# Altium PCB PCB.pcbdoc
Units mil, origin at the board's own origin, x right, y up, seen from the top; angles counter-clockwise.
Board outline 6490 x 6610 mil, 2 copper layers (Top Layer, Bottom Layer); 18 components, 24 nets, 105 pads, 2 vias.
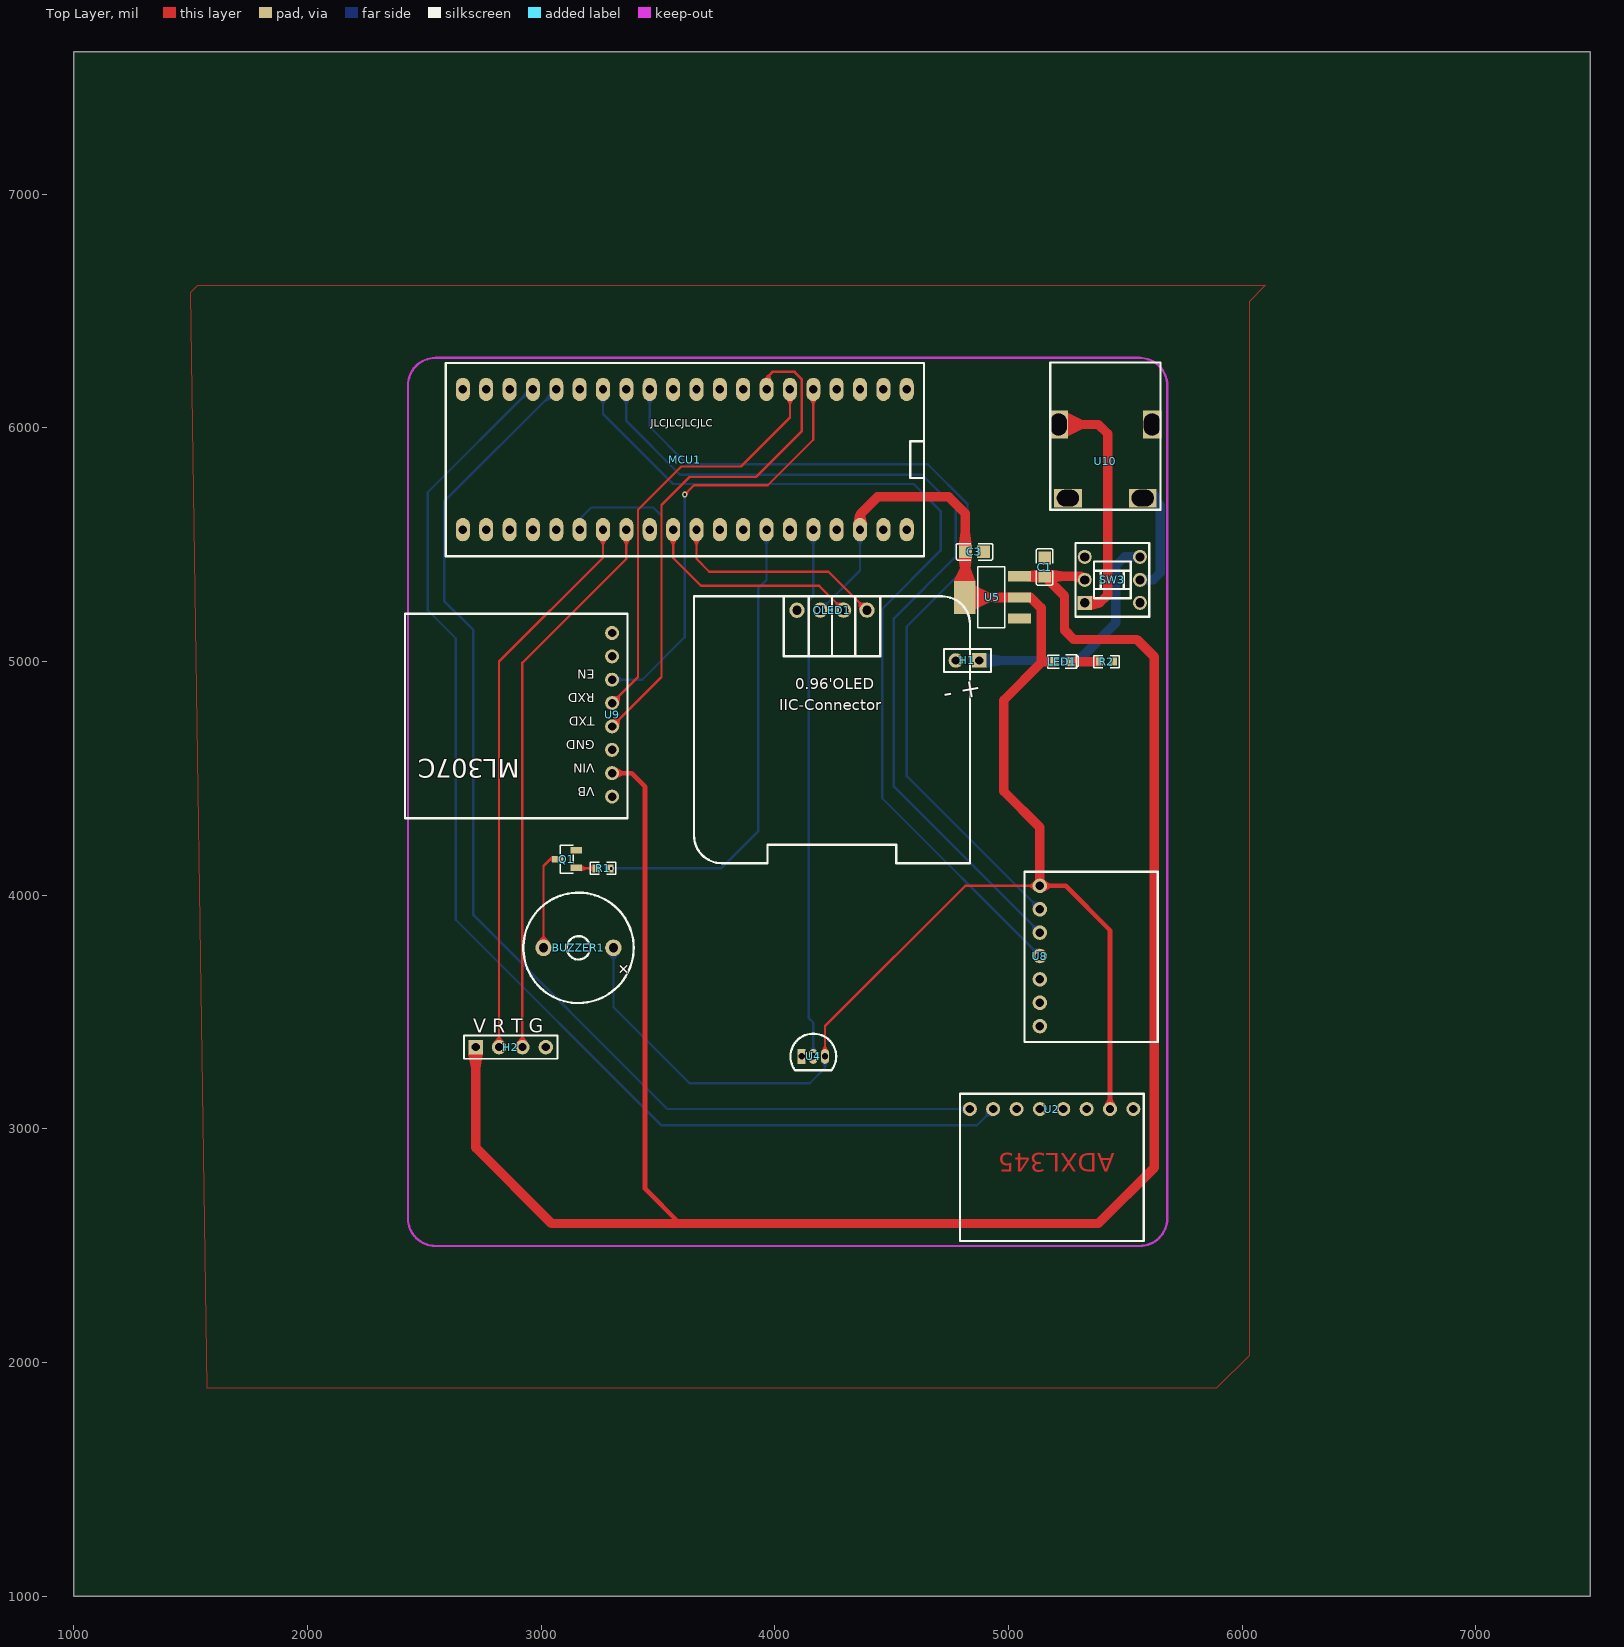
[diagram p0: Top Layer view]
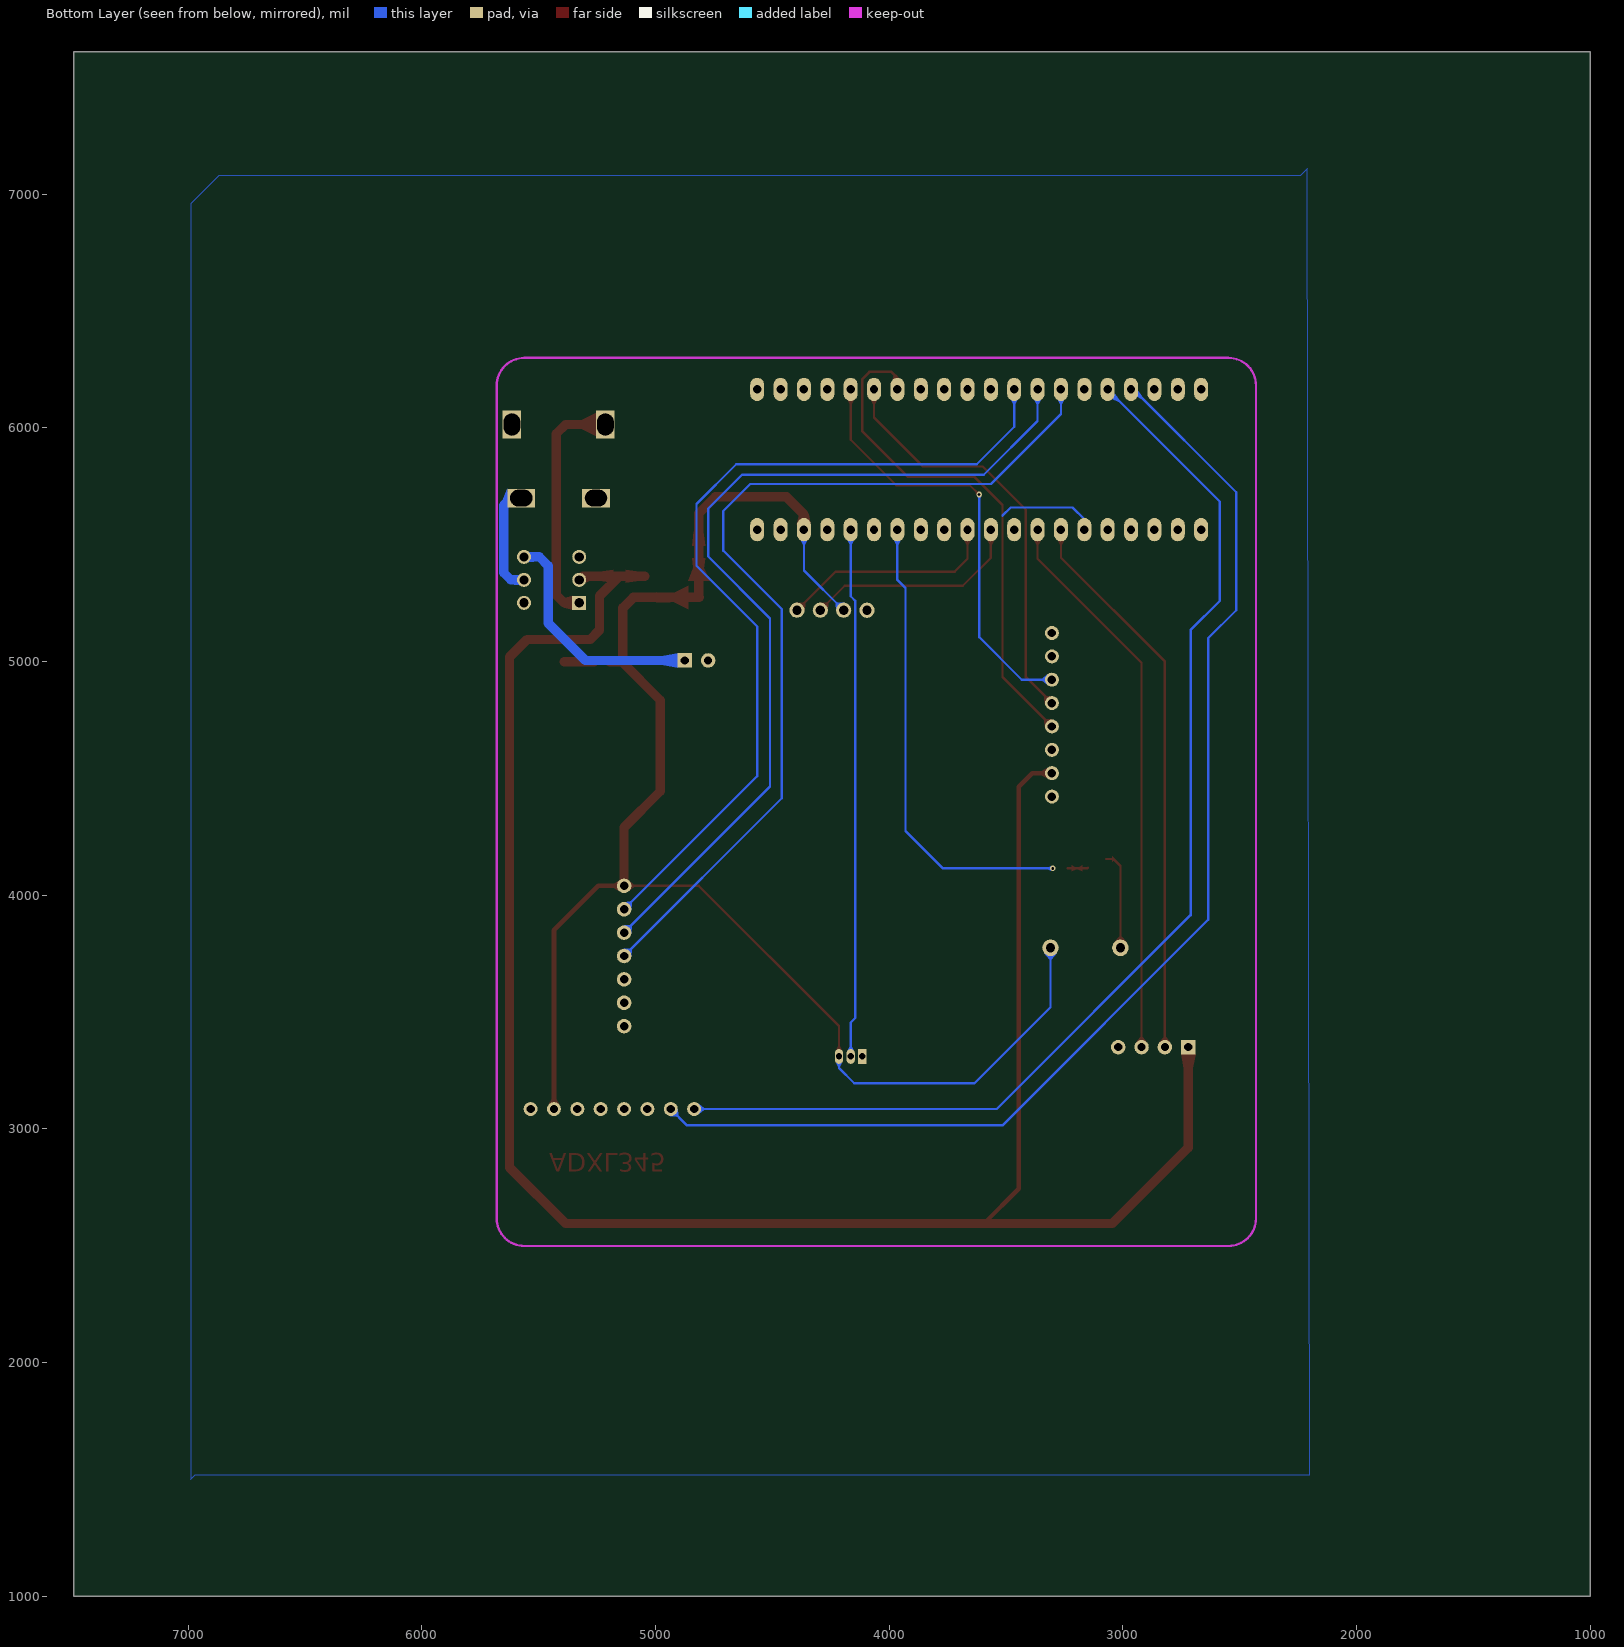
[diagram p1: Bottom Layer view, seen from below]

## Layer stack, top to bottom
Top Layer: signal copper (thickness not stored)
Dielectric: dielectric 12.6, FR-4, Dk 4.8
Bottom Layer: signal copper (thickness not stored)

## Board outline
7490,1000 1000,1000 1000,7610 7490,7610

## Components (designator, comment, footprint, x,y, rotation, side; value= is the part's Value field where it differs from the comment)
BUZZER1 "蜂鸣器" BUZ-TH_BD12.0-P7.60-D0.6-FD 3160,3775 r180 top
C1 "0.1uf" C0805 5155,5405 r270 top
C3 "0.1uf" C0805 4855,5470 r180 top
H1 "电池" HDR-F-2.54_1X2 4825,5005 r180 top
H2 "GPS模块" HDR-F-2.54_1X4 2870,3350 r0 top
LED1 "电源指示灯" LED0603_RED 5230.02,4999.97 r0 top
MCU1 "STM32F103C8T6" STM32F103C8T6_BLUE 3615,5865 r90 top
OLED1 "OLED模块" 0.96OLED_4P 4245,5220 r0 top
Q1 "S8050" SOT-23-3_L2.9-W1.3-P1.90-LS2.4-BR 3110,4155 r0 top
R1 "1k" R0603 3265,4115 r180 top
R2 "10k" R0603 5420,5000 r0 top
SW3 "HX 8-8 ZS" SW-TH_6P-L8.0-W8.0-P2.50-TL 5445,5350 r90 top
U2 "ADXL345" ADXL345 5580,3150 r270 top
U4 "DS18B20S" TO-92-3_L4.9-W3.7-P1.27-L 4165,3310 r0 top
U5 "AMS1117-3.3" SOT-223-3_L6.5-W3.5-P3.05-LS7.0 4930,5275 r0 top
U8 "MAX30102" MAX30100 5335,3740 r270 top
U9 "ML307R 4G CAT1模块" ML307R 2840,4865 r180 top
U10 "TYPEC充电放电模块" TYPEC充放电模块 5415,5965 r0 top

## Footprints (in the part's own frame and the unit in brackets; to place one, negate y for a bottom-side part, rotate by r counter-clockwise, add the part's x,y. Pads: shape width x height; smd on the part's side, far side on the other; paste and mask are expansions set on the pad)
0.96OLED_4P [mm]
  round 1.65 hole 1 paste+0 mask+0.051: 1(-3.81,-0.001) 2(-1.27,0.002) 3(1.27,0.002) 4(3.81,0.002)
  silkscreen extent -15,-27.5 15,1.5
ADXL345 [mil]
  round 60 hole 36 paste+0 mask+2: 1(65,-45) 2(65,-145) 3(65,-245) 4(65,-345) 5(65,-445) 6(65,-545) 7(65,-645) 8(65,-745)
  silkscreen extent 0,-787 630,0
BUZ-TH_BD12.0-P7.60-D0.6-FD [mm]
  round 1.8 hole 1 paste+0 mask+0.051: 1(-3.8,0) 2(3.8,0)
  silkscreen extent -6,-6 6,6
C0805 [mm]
  rect 1.41x1.35 smd paste-100 mask+0.051: 1(-1,0) 2(1,0)
  silkscreen extent -1.96,-0.9 1.96,0.9
HDR-F-2.54_1X2 [mil]
  rect 62x62 hole 35 paste+0 mask+2: 1(-50,0)
  round 62 hole 35 paste+0 mask+2: 2(50,0)
  silkscreen extent -100,-49 100,50
HDR-F-2.54_1X4 [mil]
  rect 62x62 hole 35 paste+0 mask+2: 1(-150,0)
  round 62 hole 35 paste+0 mask+2: 2(-50,0) 3(50,0) 4(150,0)
  silkscreen extent -200,-50 200,50
LED0603_RED [mm]
  rect 0.9x1 smd paste+0 mask+0.051: 1(-0.85,0) 2(0.85,0)
  silkscreen extent -1.54,-0.73 1.75,0.73
MAX30100 [mm]
  round 1.58 hole 0.914 paste+0 mask+0.051: 1(-7.62,-5.08) 2(-5.08,-5.08) 3(-2.54,-5.08) 4(0,-5.08) 5(2.54,-5.08) 6(5.08,-5.08) 7(7.62,-5.08)
  silkscreen extent -9.14,-6.75 9.36,7.75
ML307R [mil]
  round 60 hole 36 paste+0 mask+2: 1(-463.75,442.5) 2(-463.75,342.5) 3(-463.75,242.5) 4(-463.75,142.5) 5(-463.75,42.5) 6(-463.75,-57.5) 7(-463.75,-157.5) 8(-463.75,-257.5)
  silkscreen extent -530,-340 423,535
R0603 [mil]
  rect 31.75x34.02 smd paste-3937.01 mask+2: 1(-29.66,0) 2(29.66,0)
  silkscreen extent -55,-26 55,26
SOT-23-3_L2.9-W1.3-P1.90-LS2.4-BR [mm]
  rect 1.25x0.7 smd paste+0 mask+0.051: 1(1,-0.95) 2(1,0.95) 3(-1,0)
  silkscreen extent -0.73,-1.53 0.73,1.53
SOT-223-3_L6.5-W3.5-P3.05-LS7.0 [mm]
  rect 2.5x1.1 smd paste+0 mask+0.051: 1(2.97,-2.3) 2(2.97,0) 3(2.97,2.3)
  rect 2.34x3.6 smd paste+0 mask+0.051: 4(-2.97,0)
  silkscreen extent -1.57,-3.33 1.37,3.33
STM32F103C8T6_BLUE [mil]
  oval 100x60 hole 36 paste+0 mask+2: 1(-300,950) 2(-300,850) 3(-300,750) 4(-300,650) 5(-300,550) 6(-300,450) 7(-300,350) 8(-300,250) 9(-300,150) 10(-300,50) 11(-300,-50) 12(-300,-150) 13(-300,-250) 14(-300,-350) 15(-300,-450) 16(-300,-550) 17(-300,-650) 18(-300,-750) 19(-300,-850) 20(-300,-950) 21(300,-950) 22(300,-850) 23(300,-750) 24(300,-650) 25(300,-550) 26(300,-450) 27(300,-350) 28(300,-250) 29(300,-150) 30(300,-50) 31(300,50) 32(300,150) 33(300,250) 34(300,350) 35(300,450) 36(300,550) 37(300,650) 38(300,750) 39(300,850) 40(300,950)
  silkscreen extent -413,-1024 413,1024
SW-TH_6P-L8.0-W8.0-P2.50-TL [mil]
  rect 60x60 hole 39.37 paste+0 mask+2: 1(-98.43,118.11)
  round 60 hole 39.37 paste+0 mask+2: 2(0,118.11) 3(98.42,118.11) 4(-98.43,-118.11) 5(0,-118.11) 6(98.42,-118.11)
  silkscreen extent -157,-157 157,157
TO-92-3_L4.9-W3.7-P1.27-L [mm]
  rect 0.9x1.6 hole 0.7 paste+0 mask+0.051: 1(-1.27,0)
  oval 0.9x1.6 hole 0.7 paste+0 mask+0.051: 2(0,0) 3(1.27,0)
  silkscreen extent -2.48,-1.5 2.48,2.48
TYPEC充放电模块 [mm]
  rect 2x3 hole 1.8 slot 2.4 at 90 deg paste+0 mask+0.051: 1(-5.08,1.27) 2(5.08,1.27)
  rect 3x2 hole 1.8 slot 2.4 at 0 deg paste+0 mask+0.051: 3(4.064,-6.731) 4(-4.064,-6.731)
  silkscreen extent -6,-8 6,8

## Via types
v1: diameter 24.41, hole 12.2, Top Layer to Bottom Layer, tented both sides, 2 vias

## Nets (pads, with @x,y where several pads share a name; then routed paths per layer and width w, separated by ;. In a path a pad name is that pad's centre, name@x,y a point inside that pad or via, vN(x,y) a via of type N, cw(c..) or ccw(c..) an arc to the next point about the centre after c; other vN are vias at no path point)
ADC_VBAT: MCU1.5
ADX_SCL: MCU1.36 U2.8 | length 4969.4
  Bottom Layer w10: MCU1.36 2585,5685 2585,5260 2710,5135 2710,3915 3540,3085 U2.8
ADX_SDA: MCU1.37 U2.7 | length 5205.5
  Bottom Layer w10: MCU1.37 2955,6165 2515,5725 2515,5220 2635,5100 2635,3895 3515,3015 4865,3015 U2.7
BEEP: MCU1.14 R1.1 | length 2000.8
  Bottom Layer w10: v1(3300,4115) 3770,4115 3930,4275 3930,5315 3965,5350 MCU1.14
BUZZER1_2: BUZZER1.2 Q1.3 | length 422.9
  Top Layer w10: BUZZER1.2 3010.4,4125.4 3040,4155 Q1.3
DS18B20: MCU1.16 U4.2 | length 2271.6
  Bottom Layer w10: U4.2 4165,3455 4145,3475 4145,5260 4165,5280 MCU1.16
EN: MCU1.25 U9.6 | length 1859.2
  Top Layer w10: v1(3615,5715) 3655,5755 3970,5755 4165,5950 MCU1.25
  Bottom Layer w10: U9.6 3432.5,4922.5 3615,5105 v1(3615,5715)
GND: C1.1 C3.1 H1.2 H2.4 MCU1.19 MCU1.20 OLED1.1 Q1.2 R2.2 U2.1 U4.1 U5.1 U8.7 U9.3 U10.2 U10.4
GPS_RXD: H2.3 MCU1.8 | length 2399.3
  Top Layer w10: H2.3 2920,4995 3365,5440 MCU1.8
GPS_TXD: H2.2 MCU1.7 | length 2399.3
  Top Layer w10: H2.2 2820,5000 3265,5445 MCU1.7
LED1_2: LED1.2 R2.1 | length 126.8
  Top Layer w40: LED1.2 R2.1
MAX_INT: MCU1.34 U8.4 | length 4010
  Bottom Layer w10: MCU1.34 3265,6060 3565,5760 4595,5760 4710,5645 4710,5475 4460,5225 4460,4415 U8.4
MAX_SCL: MCU1.32 U8.2 | length 3735.5
  Bottom Layer w10: MCU1.32 3465,6005 3625,5845 4655,5845 4825,5675 4825,5410 4565,5150 4565,4510 U8.2
MAX_SDA: MCU1.33 U8.3 | length 3884
  Bottom Layer w10: MCU1.33 3365,6030 3595,5800 4630,5800 4775,5655 4775,5450 4510,5185 4510,4465 U8.3
OLED_SCL: MCU1.10 OLED1.3 | length 943.2
  Top Layer w10: MCU1.10 3565,5445 3685,5325 4190,5325 OLED1.3@4295,5220
OLED_SDA: MCU1.11 OLED1.4 | length 946.1
  Top Layer w10: MCU1.11 3665,5440 3720,5385 4230,5385 OLED1.4@4395,5220
Q1_1: Q1.1 R1.2 | length 87
  Top Layer w10: Q1.1 3152,4115 R1.2
RXD: MCU1.27 U9.4 | length 2213.2
  Top Layer w10: U9.4 3515,4933.7 3515,5670 3635,5790 3920,5790 4115,5985 4115,6210 4085,6240 3990,6240 3965,6215 MCU1.27
TXD: MCU1.26 U9.5 | length 1807.2
  Top Layer w10: U9.5 3415,4933.7 3415,5650 3600,5835 3855,5835 4065,6045 MCU1.26
V_3.3V: BUZZER1.1 C3.2 LED1.1 MCU1.18 OLED1.2 U2.2 U4.3 U5.2 U5.4 U8.1 | length 6941.8
  Top Layer w10: U4.3 4215,3440 4815,4040 U8.1
  Top Layer w20: U8.1 5245,4040 5435,3850 U2.2
  Top Layer w40: MCU1.18 4365,5630 4440,5705 4745,5705 4815.6,5634.4 C3.2 4815.6,5277.6 U5.4 U5.2 5095,5275 5140,5230 5140,5000 5196.5,5000 5145,5000 4980,4835 4980,4445 5135,4290 U8.1
  Bottom Layer w10: BUZZER1.1 3309.6,3520.4 3635,3195 4150,3195 4215,3260 U4.3 ; OLED1.2@4195,5220 4365,5390 MCU1.18
V_5.0V: C1.2 H2.1 SW3.2 U5.3 U9.2 | length 8835.8
  Top Layer w20: U9.2 3387.5,4522.5 3445,4465 3445,2744.3 3594.3,2595
  Top Layer w40: H2.1 2720,2920 3045,2595 4230,2595 5385,2595 5625,2835 5625,5020 5550,5095 5280,5095 5240,5135 5240,5280.6 C1.2 ; U5.3 5311.3,5365.6 SW3.2
V_BAT: H1.1 SW3.6 | length 1015.3
  Bottom Layer w40: H1.1 5300,5005 5460,5165 5460,5410 5498.4,5448.4 SW3.6
V_IN: SW3.1 U10.1 | length 1028.5
  Top Layer w40: U10.1 5385,6015 5425,5975 5425,5285 5391.6,5251.6 SW3.1
VBAT_IN: SW3.5 U10.3 | length 476.8
  Bottom Layer w40: SW3.5 5620,5350 5650,5380 5650,5670 5620,5700 U10.3
pads on no net: MCU1.1 MCU1.2 MCU1.3 MCU1.4 MCU1.6 MCU1.9 MCU1.12 MCU1.13 MCU1.15 MCU1.17 MCU1.21 MCU1.22 MCU1.23 MCU1.24 MCU1.28 MCU1.29 MCU1.30 MCU1.31 MCU1.35 MCU1.38 MCU1.39 MCU1.40 SW3.3 SW3.4 U2.3 U2.4 U2.5 U2.6 U8.5 U8.6 U9.1 U9.7 U9.8
copper on no net: | length 430.2
  Bottom Layer w10: 3165,5565 3165,5610 3215,5660 3480,5660 3515,5625

## Polygon pours and split planes (outlines as drawn)
GND on Bottom Layer (solid): 2210,7110 2240,7080 6870,7080 6990,6960 6990,1500 6970,1520 2200,1520
GND on Top Layer (solid): 1500,6580 1530,6610 6100,6610 6030,6540 6030,2030 5890,1890 1570,1890

## Keep-outs
Keep-Out Layer:
  lines w10: 2430,2617.09 ccw(c2548.11,2617.09) 2548.11,2498.97 ; 2430,6181.88 cw(c2548.11,6181.88) 2548.11,6299.99 ; 5561.88,2498.97 ccw(c5561.88,2617.09) 5679.99,2617.09 ; 5561.88,6299.99 cw(c5561.88,6181.88) 5679.99,6181.88

## Other copper
Top Layer:
  region net TXD: 3301.87,4852.44 3333.69,4820.62 3336.17,4847.84 3329.09,4854.92
  region net RXD: 3301.87,4752.44 3333.69,4720.62 3336.17,4747.84 3329.09,4754.92
  region net V_5.0V: 3323.59,4500 3323.59,4545 3344.59,4532.5 3344.59,4512.5
  region net V_3.3V: 5114.43,4016.67 5114.43,4063.33 5092.66,4045 5092.66,4035
  region net V_3.3V: 5155.57,4016.67 5155.57,4063.33 5177.34,4050 5177.34,4030
  region net V_3.3V: 5457.5,3104.84 5412.5,3104.84 5425,3125.84 5445,3125.84
  region net BUZZER1_2: 3036.97,3798.44 2983.82,3798.44 3005.39,3823.24 3015.39,3823.24
  region net GPS_TXD: 2843.25,3370.5 2796.75,3370.5 2815,3392.2 2825,3392.2
  region net GPS_RXD: 2943.25,3370.5 2896.75,3370.5 2915,3392.2 2925,3392.2
  region net OLED_SDA: 4362.58,5217.99 4397.01,5252.47 4367.24,5254.83 4360.17,5247.75
  region net OLED_SCL: 4262.58,5217.99 4297.01,5252.47 4267.24,5254.83 4260.17,5247.75
  region net V_5.0V: 5317.15,5378.37 5299.96,5336.79 5280.88,5345.6 5297.41,5385.6
  region net EN: 3627.18,5714.24 3614.24,5727.18 3623.21,5730.29 3630.29,5723.21
  region net V_5.0V: 5181.58,5393.38 5181.58,5337.87 5241.58,5345.6 5241.58,5385.6
  region net V_5.0V: 5128.43,5337.87 5128.43,5393.38 5068.43,5385.6 5068.43,5345.6
  region net V_3.3V: 4787.87,5496.57 4843.38,5496.57 4835.6,5556.57 4795.6,5556.57
  region net V_3.3V: 4843.38,5443.43 4787.87,5443.43 4795.6,5383.43 4835.6,5383.43
  region net V_5.0V: 2751,3319 2689,3319 2700,3259 2740,3259
  region net Q1_1: 3173.97,4127.5 3173.97,4103.82 3188.97,4110 3188.97,4120
  region net BUZZER1_2: 3046.02,4142.5 3046.03,4167.5 3040,4160 3040,4150
  region net Q1_1: 3219.47,4102.5 3219.47,4127.5 3204.47,4120 3204.47,4110
  region net V_IN: 5356.89,5221.57 5356.89,5281.57 5391.6,5271.6 5391.6,5231.6
  region net V_3.3V: 4859.13,5325 4859.13,5225 4919.13,5255 4919.13,5295
  region net V_3.3V: 4767.01,5345.87 4859.13,5345.87 4835.6,5405.87 4795.6,5405.87
  region net V_5.0V: 5096.14,5387.2 5096.14,5343.9 5156.14,5345.6 5156.14,5385.6
  region net V_3.3V: 4997.71,5253.35 4997.71,5296.65 4937.71,5295 4937.71,5255
  region net V_IN: 5254.37,6065 5254.37,5965 5314.37,5995 5314.37,6035
  region net GPS_TXD: 3277.5,5517.73 3252.5,5517.73 3260,5502.73 3270,5502.73
  region net GPS_RXD: 3377.5,5517.73 3352.5,5517.73 3360,5502.73 3370,5502.73
  region net OLED_SCL: 3577.5,5517.73 3552.5,5517.73 3560,5502.73 3570,5502.73
  region net OLED_SDA: 3677.5,5517.73 3652.5,5517.73 3660,5502.73 3670,5502.73
  region net V_3.3V: 4395,5585 4335,5585 4345,5630 4385,5630
  region net EN: 4177.5,6117.73 4152.5,6117.73 4160,6102.73 4170,6102.73
  region net TXD: 4077.5,6117.73 4052.5,6117.73 4060,6102.73 4070,6102.73
  region net RXD: 3977.5,6212.27 3952.5,6212.27 3960,6215 3970,6215
  region net RXD: 3984.08,6208.15 3959.92,6214.57 3970.27,6227.34 3981.44,6224.37
  region net V_3.3V: 4227.5,3336.33 4202.5,3336.33 4210,3351.33 4220,3351.33
Bottom Layer:
  region net EN: 3323.59,4900 3323.59,4945 3344.59,4927.5 3344.59,4917.5
  region net MAX_INT: 5103.96,3738.05 5136.95,3771.04 5108.59,3773.48 5101.52,3766.41
  region net MAX_SDA: 5103.96,3838.05 5136.95,3871.04 5108.59,3873.48 5101.52,3866.41
  region net MAX_SCL: 5103.96,3938.05 5136.95,3971.04 5108.59,3973.48 5101.52,3966.41
  region net ADX_SDA: 4905.06,3086.88 4936.88,3055.06 4909.66,3052.58 4902.58,3059.66
  region net ADX_SCL: 4815.16,3062.5 4815.16,3107.5 4794.16,3090 4794.16,3080
  region net V_3.3V: 3336.17,3751.56 3283.02,3751.56 3304.6,3726.76 3314.6,3726.76
  region net V_3.3V: 4192.99,5252.47 4227.42,5217.99 4229.83,5247.75 4222.76,5254.83
  region net VBAT_IN: 5582.95,5327.5 5582.95,5372.5 5603.95,5370 5603.95,5330
  region net V_BAT: 5543.28,5425.91 5543.26,5470.91 5522.26,5468.4 5522.28,5428.4
  region net BEEP: 3308.07,4105.85 3308.07,4124.15 3316.62,4120 3316.62,4110
  region net EN: 3605.85,5706.93 3624.15,5706.93 3620,5698.38 3610,5698.38
  region net V_BAT: 4906,5036 4906,4974 4966,4985 4966,5025
  region net VBAT_IN: 5634.05,5739.37 5628.53,5660.63 5635.86,5655.86 5651.85,5696.43
  region net BEEP: 3977.5,5517.73 3952.5,5517.73 3960,5502.73 3970,5502.73
  region net DS18B20: 4177.5,5517.73 4152.5,5517.73 4160,5502.73 4170,5502.73
  region net V_3.3V: 4377.5,5517.73 4352.5,5517.73 4360,5502.73 4370,5502.73
  region net MAX_SCL: 3477.5,6117.73 3452.5,6117.73 3460,6102.73 3470,6102.73
  region net MAX_SDA: 3377.5,6117.73 3352.5,6117.73 3360,6102.73 3370,6102.73
  region net MAX_INT: 3277.5,6117.73 3252.5,6117.73 3260,6102.73 3270,6102.73
  region net ADX_SCL: 3043.56,6124.01 3035,6147.5 3020,6127.07 3020,6112.93
  region net ADX_SDA: 2937.66,6132.64 2935,6157.5 2920,6137.07 2920,6122.93
  region net V_3.3V: 4227.5,3283.67 4202.5,3283.67 4210,3268.67 4220,3268.67
  region net DS18B20: 4177.5,3336.33 4152.5,3336.33 4160,3351.33 4170,3351.33

## Silkscreen, mask and mechanical layers (free items; w line width, h text height)
Top Overlay:
  text "JLCJLCJLCJLC" at 3470,6004.25 h31.5
  text "- +" at 4726.95,4825.61 h80 r10
  text "V R T G" at 2710,3410.47 h59.05

## Text inside footprints (layer, text, board x,y; h text height)
BUZZER1: Top Overlay "+" at 3317.31,3687.82 h50 r315
OLED1: Top Overlay "IIC-Connector" at 4018.4,4792.94 h47.24; Top Overlay "0.96'OLED" at 4087.6,4881.43 h47.24
U9: Top Overlay "EN" at 3230,4965.19 h39.37 r180; Top Overlay "RXD" at 3230,4864.69 h39.37 r180; Top Overlay "TXD" at 3230,4764.19 h39.37 r180; Top Overlay "VIN" at 3230,4563.19 h39.37 r180; Top Overlay "VB" at 3230,4462.69 h39.37 r180; Top Overlay "ML307C" at 2908.75,4582.5 h80 r180; Top Overlay "GND" at 3230,4663.69 h39.37 r180